# Altium PCB motor_driver.PcbDoc
Units mil, origin at the board's own origin, x right, y up, seen from the top; angles counter-clockwise.
Board outline 6000 x 4000 mil, 2 copper layers (Top Layer, Bottom Layer); 9 components, 11 nets, 37 pads, 6 vias.
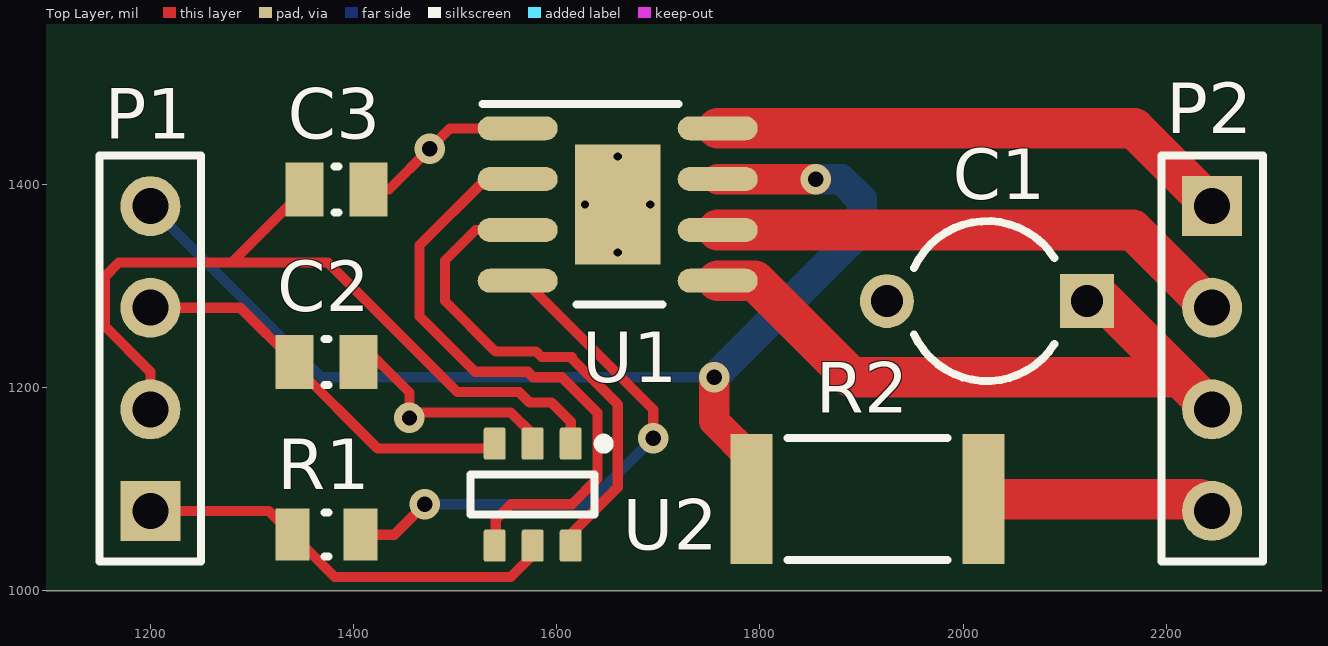
[diagram p0: Top Layer view]
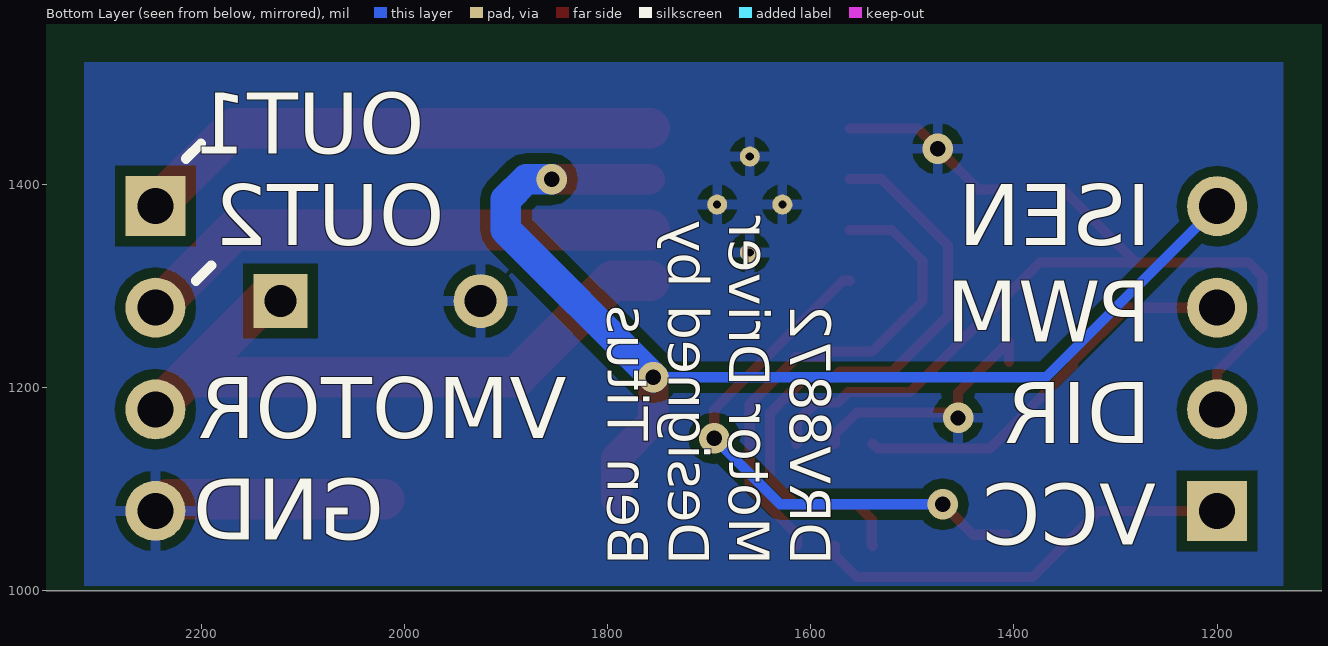
[diagram p1: Bottom Layer view, seen from below]

## Layer stack, top to bottom
Top Solder: solder mask 0.4, Solder Resist, Dk 3.5
Top Layer: signal copper 1.4
Dielectric 1: dielectric 12.6, FR-4, Dk 4.8
Bottom Layer: signal copper 1.4
Bottom Solder: solder mask 0.4, Solder Resist, Dk 3.5

## Board outline
1000,1000 7000,1000 7000,5000 1000,5000

## Design rules (kind name [scope] priority, off if disabled: settings)
Clearance [All] p1: gap=10 ignorepadtopadclearanceinfootprint=FALSE except(0: Arc-Hole Track-Hole SMDPad-Hole THPad-Hole Via-Hole Fill-Hole Poly-Hole Region-Hole Text-Hole)
PolygonConnect [All] p1: connectstyle=Relief reliefconductorwidth=10 reliefentries=4 polygonreliefangle="90 Angle" airgapwidth=10
RoomDefinition motor_driver [InComponentClass('motor_driver')] p1: confinementstyle=ConfineIn formatcopy=TRUE lockcomponents=FALSE outline 1135,1005 2315,1005 2315,1520 1135,1520
RoutingVias [All] p1: holewidth=28 width=50 viastyle="Through Hole" minholewidth=8 minwidth=20 maxholewidth=28 maxwidth=50
SilkToSolderMaskClearance [IsPad] p1: minsilkscreentomaskgap=8 clearancetoexposedcopper=TRUE
SolderMaskExpansion [All] p1: expansion=4
Width [All] p1: maxlimit=50 minlimit=10 preferedwidth=10
29 further rules are at their usual default settings.

## Components (designator, comment, footprint, x,y, rotation, side; value= is the part's Value field where it differs from the comment)
C1 "100uF" CAPR5-4X5 2023.43,1285 r180 top
C2 "10nF" CAPC0805(2012)145_L 1373.46,1225 r180 top
C3 "10nF" CAPC0805(2012)145_L 1383.46,1394.88 r180 top
P1 "Header 4" HDR1X4 1200,1078.43 r90 top
P2 "Header 4" HDR1X4 2245,1378.43 r270 top
R1 "10k" RESC0805(2012)_L 1373.46,1055 r0 top
R2 "0.1 Shunt Resistor" RESC2512(6432)_L 1905.83,1090 r180 top
U1 "DRV8872DDAR" DDA0008H_N 1660,1380 r0 top value=Value
U2 "SN74LVC1G18DBVR" DBV0006A_L 1576.34,1094.43 r270 top

## Footprints (in the part's own frame and the unit in brackets; to place one, negate y for a bottom-side part, rotate by r counter-clockwise, add the part's x,y. Pads: shape width x height; smd on the part's side, far side on the other; paste and mask are expansions set on the pad)
CAPC0805(2012)145_L [mm]
  rect 0.95x1.35 smd: 1(-0.8,0) 2(0.8,0)
  silkscreen extent -0.05,-0.58 0.05,0.58, body extent -1.1,-0.72 1.1,0.72, height 1.45
CAPR5-4X5 [mm] "Capacitor; 2 Leads"
  rect 1.35x1.35 hole 0.8: 1(-2.5,0)
  round 1.35 hole 0.8: 2(2.5,0)
  silkscreen extent -1.69,-2 1.82,2
DBV0006A_L [mm] "SOT23, 6-Leads, Body 3.05x1.75mm, Pitch 0.95mm, IPC High Density"
  rrect18% 0.8x0.55 smd: 1(-1.275,0.95) 2(-1.275,0) 3(-1.275,-0.95) 4(1.275,-0.95) 5(1.275,0) 6(1.275,0.95)
  silkscreen extent -1.4,-1.55 0.5,1.9, body extent -1.42,-1.46 1.42,1.46, height 1.11
DDA0008H_N [mm]
  oval 2x0.6 smd paste+0 mask+0.051: 1(-2.5,1.905) 2(-2.5,0.635) 3(-2.5,-0.635) 4(-2.5,-1.905) 5(2.5,-1.905) 6(2.5,-0.635) 7(2.5,0.635) 8(2.5,1.905)
  rect 2.13x3 smd paste+0 mask+0.051: 9(0,0)
  round 0.5 / inner round 1.524 / far side round 0.5 hole 0.203 mask+0.051: V(-0.815,0) V(0,-1.2) V(0,1.2) V(0.815,0)
  silkscreen extent -3.38,-2.5 1.53,2.51, body extent 0,0 0.25,0.25, height 0.25
HDR1X4 [mm] "Connector; Header; 4 Position"
  rect 1.5x1.5 hole 0.9: 1(0,0)
  round 1.5 hole 0.9: 2(2.54,0) 3(5.08,0) 4(7.62,0)
  silkscreen extent -1.27,-1.27 8.89,1.27
RESC0805(2012)_L [mm]
  rect 0.85x1.3 smd: 1(-0.85,0) 2(0.85,0)
  silkscreen extent -0.05,-0.55 0.05,0.55, body extent -1.1,-0.67 1.1,0.68, height 0.7
RESC2512(6432)_L [mm]
  rect 1.05x3.25 smd: 1(-2.9,0) 2(2.9,0)
  silkscreen extent -2,-1.52 2,1.53, body extent -3.25,-1.7 3.25,1.7, height 0.75

## Part data
C1: library part Cap2, "Capacitor", PackageDescription="Capacitor; 2 Leads", PackageReference=CAPR5-4X5, Published=23-Sep-2002, Publisher="Altium Limited"
C2 C3: library part CMP-1590-00003-1, "0805 (2012 Metric) Chip Capacitor", Case-EIA=0805, Case-Metric=2012, PackageReference=CAPC0805(2012)145
P1 P2: "Header, 4-Pin", LatestRevisionDate=17-Jul-2002, LatestRevisionNote="Re-released for DXP Platform.", Publisher="Altium Limited"
R1: library part CMP-1591-00002-1, "0805 (2012 Metric) Chip Resistor", Case-EIA=0805, Case-Metric=2012, PackageReference=RESC0805(2012)
R2: library part CMP-1591-00007-1, "2512 (6432 Metric) Chip Resistor", Case-EIA=2512, Case-Metric=6432, PackageReference=RESC2512(6432)
U1: "Imported", Alternate_PartNumber=DRV8872DDA, Manufacturer="Texas Instruments", CompType=IC, MountType=SMT, PackageReference=DDA0008H, PartNumber=DRV8872DDAR, PIN_COUNT=9, RefDes=RefDes, TYPE=TYPE
U2: library part CMP-0859-00184-3, "One of Two Noninverting Demultiplexer with 3-State Deselected Output, DBV0006A, LARGE T&R", F @ Nom Voltage(Max)(Mhz)=150, Generic Part Number=SN74LVC1G18, ICC @ Nom Voltage(Max)(mA)=0.01, Manufacturer="Texas Instruments", Operating Temperature Range(C)="-40 to 85", Rating=Catalog, tpd @ Nom Voltage(Max)(ns)=9.3,5,4.2,3.2, Voltage(Nom)(V)=1.8,2.5,3.3,5, 3-State Output=No, Bits(#)=1, DatasheetVersion=SCES406K, Input Type=CMOS/TTL, Logic=True, Output Drive (IOL/IOH)(Max)(mA)=32/-32, Output Type=CMOS, PackageReference=DBV0006A, Schmitt Trigger=No, Specialty Logic Family=Decoder/Encoder/Multiplexer, Sub-Family=Decoder/Encoder/Multiplexer, Technology Family=LVC, VCC(Max)(V)=5.5, VCC(Min)(V)=1.65

## Via types
v1: diameter 30, hole 15, Top Layer to Bottom Layer, 6 vias

## Nets (pads, with @x,y where several pads share a name; then routed paths per layer and width w, separated by ;. In a path a pad name is that pad's centre, name@x,y a point inside that pad or via, vN(x,y) a via of type N, cw(c..) or ccw(c..) an arc to the next point about the centre after c; other vN are vias at no path point)
+12: C1.1 P2.3 U1.5 | length 661.6
  Top Layer w40: U1.5 1795,1305 1890,1210 2213.43,1210 ; C1.1 2138.43,1285 2213.43,1210 ; P2.3 2213.43,1210
A_Demux: C2.2 P1.3 U2.3 | length 400.2
  Top Layer w10: P1.3 1288.54,1278.43 C2.2 1341.97,1221.5 1423.47,1140 1534.31,1140 U2.3
GND: C1.2 C2.1 C3.1 P2.4 R2.1 U1.1 U1.9 U1.V U2.2 | length 658.8
  Top Layer w10: C2.1 1404.96,1245.04 1455,1195 v1(1455,1170) 1460.38,1175.38 1554.84,1175.38 1576.34,1153.87 U2.2 ; C3.1 1434.88,1394.88 v1(1475,1435) 1495,1455 U1.1 ; P2.4@2233.43,1090 P2.4
  Top Layer w40: R2.1 P2.4@2233.43,1090
IN1: U1.3 U2.6 | length 495.3
  Top Layer w10: U1.3 1520,1355 1490,1325 1490,1285 1539.62,1235.38 1579.69,1235.38 1585.07,1230 1615,1230 1615,1228.28 1660,1183.28 1660,1101.72 1613.74,1055.46 U2.6
IN2: U1.2 U2.4 | length 615.6
  Top Layer w10: U2.4 1540,1045.3 1540,1070 1555,1085 1615,1085 1640,1110 1640,1175 1605,1210 1576.78,1210 1571.4,1215.38 1519.62,1215.38 1465,1270 1465,1340 1530,1405 U1.2
NetP1_4: P1.4 R2.2 U1.7 | length 1151.9
  Top Layer w10: v1(1855,1405) v1@1860,1400
  Top Layer w30: v1(1755,1210) 1755,1166.65 1791.65,1130 R2.2 ; U1.7 v1(1855,1405)
  Bottom Layer w10: P1.4 1368.43,1210 v1(1755,1210)
  Bottom Layer w30: v1(1755,1210) 1900,1355 1900,1385 1880,1405 v1(1855,1405)
NetP2_1: P2.1 U1.8 | length 518.3
  Top Layer w40: U1.8 2168.43,1455 P2.1
NetP2_2: P2.2 U1.6 | length 518.3
  Top Layer w40: U1.6 2166.94,1355 2243.52,1278.43 P2.2
NetR1_2: R1.2 U1.4 | length 541.6
  Top Layer w10: R1.2 1440,1055 v1(1470,1085) ; U1.4 1568.28,1305 1695,1178.28 v1(1695,1150)
  Bottom Layer w10: v1(1470,1085) 1630,1085 v1(1695,1150)
S_Demux: C3.2 P1.2 U2.1 | length 801.6
  Top Layer w10: P1.2 1200,1215.45 1155.47,1259.98 1155.47,1309.53 1168.9,1322.95 1280.04,1322.95 ; C3.2 1280.04,1322.95 ; U2.1 1613.74,1166.26 1595,1185 1573.5,1185 1563.12,1195.38 1502.28,1195.38 1374.71,1322.95 1280.04,1322.95
VCC: P1.1 R1.1 U2.5 | length 421.4
  Top Layer w10: P1.1 1316.57,1078.43 R1.1 1381.51,1013.49 1554.84,1013.49 1576.34,1034.99 U2.5

## Polygon pours and split planes (outlines as drawn)
GND on Bottom Layer "GND_L02_P004" (solid, pour order 4): 1135,1005 2315,1005 2315,1520 1135,1520

## Silkscreen, mask and mechanical layers (free items; w line width, h text height)
Bottom Overlay:
  lines w10: 2190,1320 2205,1305 ; 2200,1440 2215,1425
  text "OUT1" at 1980,1430 h60
  text "ISEN" at 1265,1340 h60
  text "OUT2" at 1960,1340 h60
  text "PWM" at 1265,1245 h60
  text "VMOTOR" at 1840,1150 h60
  text "DIR" at 1265,1145 h60
  text "GND" at 2020,1050 h60
  text "VCC" at 1260,1045 h60
  text "DRV8872 / Motor Driver / Designed by / Ben Titus" at 1800,1025 h40 r90